# Allegro board TinyBMS-1.brd
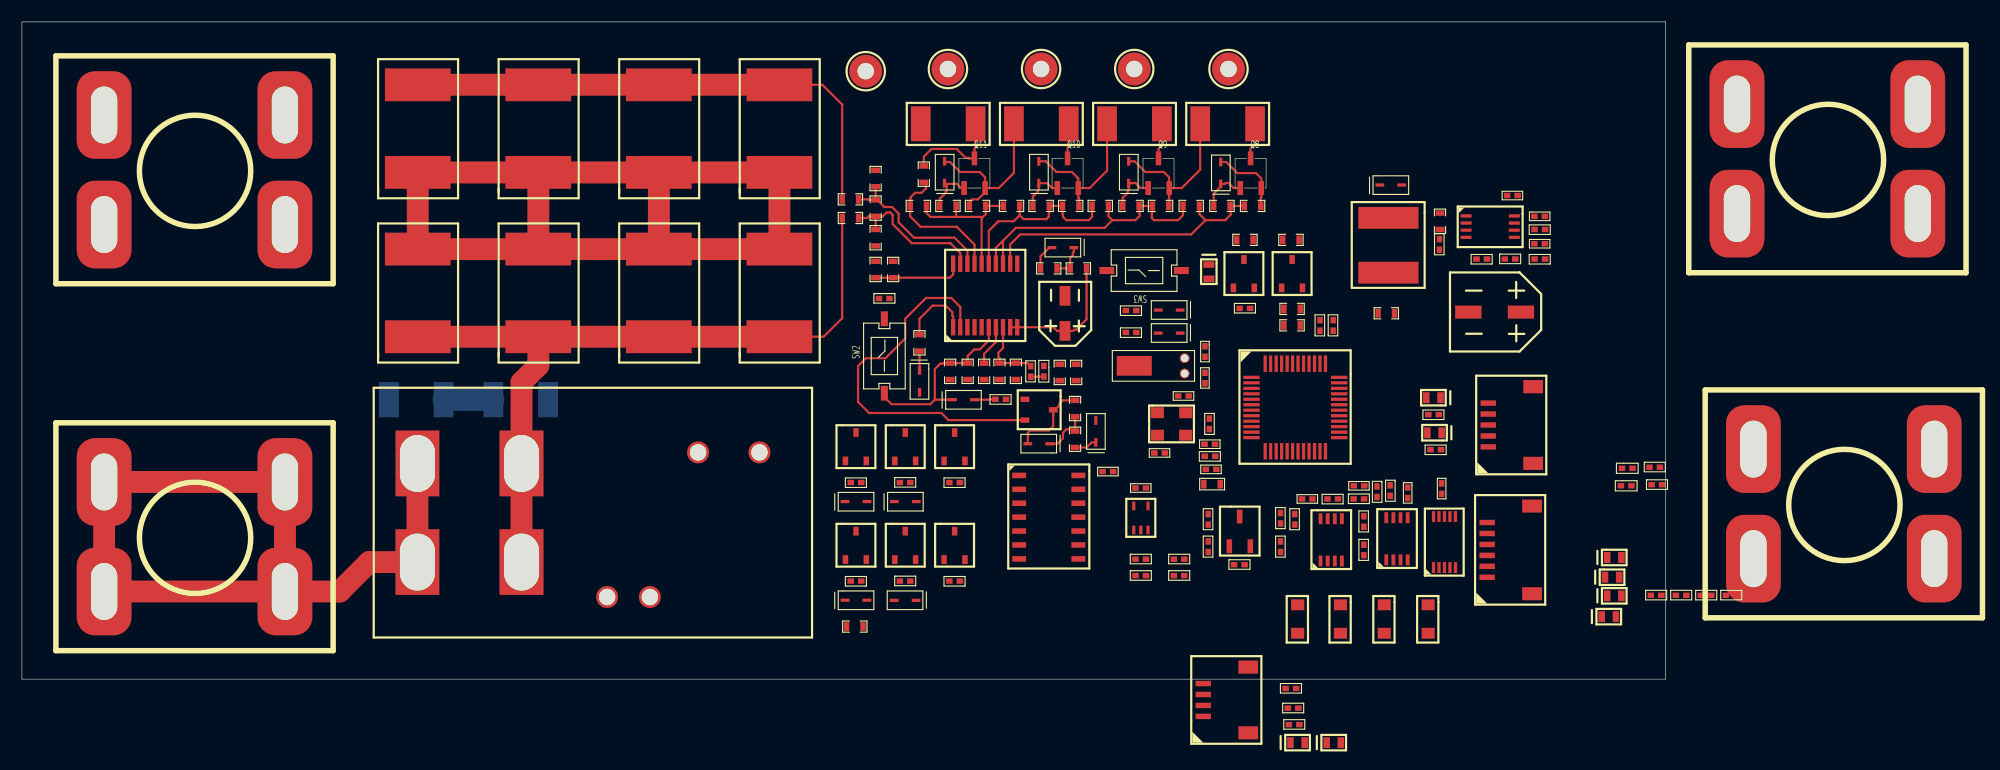
[diagram p0: board, top side]
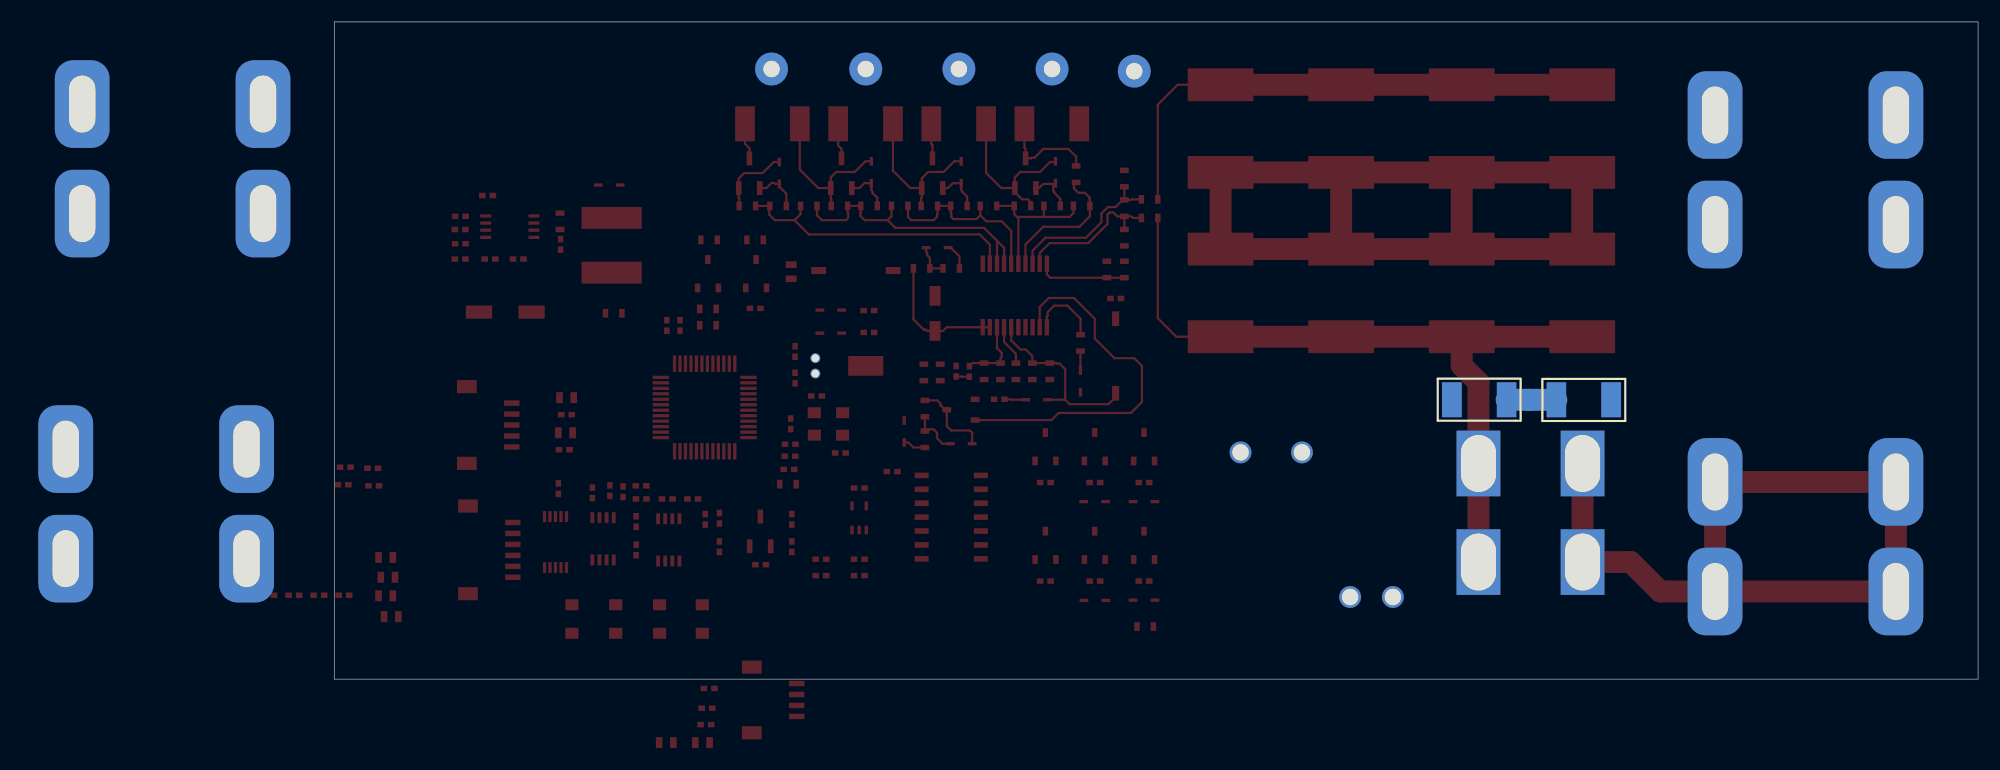
[diagram p1: board, bottom side, seen from below]

Outline 150 x 60 mm; copper layers: TOP, BOTTOM. Coordinates in mm from the lower left corner of the outline.
Outline path: 0,60 0,0 150,0 150,60 0,60

## Design rules (mm)
constraint set DEFAULT: min track width 0.127

## Placement (name value [footprint] x y rotation side)
C1  1uF  [C0603]  107.5 43.6 180 top
C6  0.1uF  [C0603]  77.5 43.8 270 top
C7  0.1uF  [C0603]  77.5 46.5 270 top
C8  0.1uF  [C0603]  77.5 41.1 270 top
C10  1uF/16V  [C0603]  87.4 28.9 270 top
C17  470pF  [C0603]  79.9 36.6 90 top
C18  10uF/6.3V  [C0603]  88.8 28.9 270 top
C19  0.1uF  [C0402]  107.9 21.2 0 top
C24  470pF  [C0603]  84.3 28.9 270 top
C25  12pF  [C0402]  105.5 25.6 0 top
C26  12pF  [C0402]  104.3 20.9 180 top
C27  12pF  [C0402]  108.2 27 90 top
C28  12pF  [C0402]  107.7 30.4 270 top
C29  0.1uF  [C0402]  109 19.4 180 top
C30  0.1uF  [C0402]  138 42 0 top
C31  0.1uF  [C0402]  136.5 44.4 180 top
C32  0.1uF  [C0603]  129 42.6 270 top
C33  0.1uF  [C0402]  138 39.5 0 top
C34  100uF/16V  [SMD-CAP-D6D3XL5D4MM]  134.4 33.5 180 top
C36  0.1uF  [C0402]  116.8 16.2 0 top
C37  0.1uF  [C0402]  126.2 17.5 270 top
C38  0.1uF  [C0402]  129.8 16.9 90 top
C39  0.1uF  [C0402]  122.5 17.9 180 top
C40  DNP  [R2512]  36 25.5 180 bottom
C41  0.1uF  [C0402]  98.6 18.7 0 top
C42  0.1uF  [C0402]  101.6 17.2 0 top
C43  1uF  [C0603]  99.2 43.6 180 top
C44  1uF  [C0603]  91.1 43.6 180 top
C45  1uF  [C0603]  82.6 43.6 180 top
C46  10uF/35V  [SMD-CAP-D4XL5D4MM]  95.2 33.4 90 top
D1  SD05-7  [SOD-323]  109.4 46.2 90 top
D7  1N4148WS  [SOD-323]  92.8 21.5 180 top
D8  1N4148WS  [SOD-323]  95 39.4 180 top
D9  LTVS16H5.0T5G  [DFN1610-2]  128.9 22.5 180 top
D11  LTVS16H5.0T5G  [DFN1610-2]  108.3 37.2 270 top
D14  LTVS16H5.0T5G  [DFN1610-2]  116.4 -5.8 0 top
D15  LTVS16H5.0T5G  [DFN1610-2]  119.7 -5.8 0 top
D16  LED  [LED0402]  93 28.6 270 top
D17  LED  [LED0402]  146 19 0 top
D18  LED  [LED0402]  145.9 17.4 0 top
D19  1N4148WS  [SOD-323]  85.9 25.5 0 top
D20  NSR0340HT1G  [SOD-323]  124.9 45.1 0 top
D22  1N4148WS  [SOD-323]  104.7 33.7 180 top
D23  1N4148WS  [SOD-323]  104.7 31.6 180 top
D24  1N4148WS  [SOD-323]  80.6 7.2 180 top
D25  1N4148WS  [SOD-323]  80.6 16.2 0 top
D26  1N4148WS  [SOD-323]  76.1 7.2 0 top
D27  1N4148WS  [SOD-323]  76.1 16.2 0 top
D28  LTVS16H5.0T5G  [DFN1610-2]  144.8 5.7 0 top
D29  LTVS16H5.0T5G  [DFN1610-2]  145.1 9.3 0 top
D30  LTVS16H5.0T5G  [DFN1610-2]  145.3 7.6 0 top
D31  LTVS16H5.0T5G  [DFN1610-2]  145.3 11.1 0 top
D32  MM3Z4V7T1G  [SOD-323]  81.9 27.2 270 top
D33  MM3Z4V7T1G  [SOD-323]  98 22.6 90 top
D34  SD05-7  [SOD-323]  101 46.26 90 top
D35  SD05-7  [SOD-323]  92.8 46.26 90 top
D36  SD05-7  [SOD-323]  84.2 46.26 90 top
D37  LTVS16H5.0T5G  [DFN1610-2]  128.8 25.7 180 top
J4  Header1x4  [SMD-HOR-SH1D0-4P]  107.8 -3.4 90 top
J6  Header1x6  [SMD-HOR-SH1D0-6P]  133.7 9.3 90 top
J7  Header1x5  [SMD-HOR-SH1D0-5P]  133.8 21.2 90 top
J8  -  [MFX04645]  7.5 51.5 0 top
J9  -  [MFX04645]  7.5 18 0 top
J10  -  [MFX04645]  156.5 52.5 0 top
J11  -  [MFX04645]  158 21 0 top
L1  4.7uH  [L0603]  107.8 17.4 0 top
L2  CD54/68uH  [SMD-IND-6X6X4D4MM]  124.7 39.7 270 top
NOREF  -  []  69.33 4.2 90 top
NOREF#2  -  []  57.35 20.71 0 top
NOREF#3  -  []  36.09 10.69 90 top
NOREF#4  -  []  61.65 20.71 0 top
NOREF#5  -  []  53.35 9.86 0 top
NOREF#6  -  []  32.5 9.86 0 top
NOREF#7  -  []  45.55 9.86 0 top
NOREF#8  -  []  36.09 19.69 0 top
NOREF#9  -  []  69.3 7.45 90 top
NOREF#10  -  []  36.05 9.86 0 top
Q8  FH3400C  [SOT-23-3]  110.7 44.4 0 top
Q9  FH3400C  [SOT-23-3]  102.3 44.4 0 top
Q10  FH3400C  [SOT-23-3]  94 44.4 0 top
Q11  FH3400C  [SOT-23-3]  85.5 44.4 0 top
Q12  FH3400C  [SOT-23]  85.1 12.2 0 top
Q13  FH3400C  [SOT-23]  76.1 12.2 0 top
Q14  FH3400C  [SOT-23]  76.1 21.2 0 top
Q15  FH3400C  [SOT-23]  85.1 21.2 0 top
Q16  FH3400C  [SOT-23]  111.5 37 0 top
Q17  FH3415C+  [SOT-23]  80.6 12.2 0 top
Q18  FH3415C+  [SOT-23]  80.6 21.2 0 top
Q19  FH3415C+  [SOT-23]  115.9 37 0 top
Q20  FH3415C+  [SOT-23]  92.8 24.6 270 top
R1  1K  [R0603]  113.1 43.6 180 top
R6  100  [R0603]  74.8 43.4 0 top
R7  100  [R0603]  74.8 41.7 0 top
R8  3mR/5W  [LVS3920-1050]  36.1 50.2 90 top
R10  1M  [R0603]  75.2 4.4 0 top
R12  2.2K  [R0603]  82.3 29.9 90 top
R14  1M  [R0603]  77.5 38.2 270 top
R16  100  [R0603]  95.6 37.1 0 top
R17  10K  [R0603]  96.6 27.2 90 top
R19  1K  [R0603]  92.9 37.1 0 top
R20  10K  [R0603]  95.1 27.2 90 top
R24  1M  [R0603]  96.5 23.9 90 top
R25  10K  [R0402]  108.9 20.6 180 top
R29  DNP  [R0603]  91.1 27.3 90 top
R31  10K  [R0402]  89.8 25.8 180 top
R37  0  [R0402]  118.7 31.8 90 top
R38  DNP  [R0402]  119.9 31.8 90 top
R39  10K  [R0402]  115.5 -2.9 0 top
R40  10K  [R0402]  115.3 -1.1 0 top
R41  1K  [R0402]  115.6 -4.4 0 top
R43  1K  [R0402]  129.3 24.4 180 top
R44  2K  [R0402]  92.3 27.6 90 top
R45  2K  [R0402]  148.5 19.1 0 top
R46  2K  [R0402]  148.7 17.5 0 top
R47  1M  [R0402]  108.1 23.8 270 top
R48  100K  [R0402]  129.6 39.2 90 top
R50  2K  [R0402]  133.7 38.6 180 top
R51  1K  [R0402]  135.3 38.1 0 top
R52  10K  [R0402]  139 38.6 180 top
R53  0  [R0603]  123.7 33 0 top
R55  100K  [R0603]  115.1 33.4 0 top
R57  100  [R0402]  101.7 31.9 180 top
R59  100K  [R0402]  76.6 9.2 180 top
R60  100K  [R0402]  76.6 18.2 180 top
R61  47K  [R0402]  80.1 8.7 0 top
R62  47K  [R0402]  80.1 17.7 0 top
R63  100K  [R0402]  85.6 9.2 180 top
R64  100K  [R0402]  85.6 18.2 180 top
R65  1K  [R0402]  101.6 10.7 0 top
R66  1K  [R0402]  105.1 10.7 0 top
R67  1K  [R0402]  148.63 7.41 0 top
R68  1K  [R0402]  150.91 7.41 0 top
R69  1K  [R0402]  153.19 7.41 0 top
R70  1K  [R0402]  155.48 7.41 0 top
R71  365  [R0402]  110.6 10.2 0 top
R72  DNP  [R0402]  108.5 11.6 90 top
R73  0  [R0402]  108.5 14.1 90 top
R74  2.15K  [R0402]  116.4 14.1 90 top
R75  PT100  [R1210]  116.4 5.5 270 top
R76  2.15K  [R0402]  115.1 14.2 90 top
R77  100  [R0402]  115.1 11.6 90 top
R78  10K  [R0402]  122.7 11.3 90 top
R79  237K  [R0402]  120.1 16.7 180 top
R80  10K  [R0402]  122.7 13.9 90 top
R81  237K  [R0402]  121.5 16.2 0 top
R82  PT100  [R1210]  120.3 5.5 270 top
R83  PT100  [R1210]  124.3 5.5 270 top
R84  PT100  [R1210]  128.3 5.5 270 top
R85  15.1K  [R0402]  124.6 17.7 270 top
R86  15.1K  [R0402]  123.4 17.6 270 top
R87  DNP  [R2512]  45.5 25.5 0 bottom
R88  2.2K  [R0603]  96.5 21.1 90 top
R89  DNP  [R0402]  101.6 9.2 0 top
R90  DNP  [R0402]  105.1 9.2 0 top
R91  39  [R2512]  110 50.7 0 top
R92  10K  [R0603]  108.7 42.8 0 top
R93  39  [R2512]  101.5 50.7 0 top
R94  10K  [R0603]  100.4 42.8 0 top
R95  1K  [R0603]  104.7 43.6 180 top
R96  10K  [R0603]  92.2 42.8 0 top
R97  1K  [R0603]  96.5 43.6 180 top
R98  39  [R2512]  93 50.7 0 top
R99  10K  [R0603]  83.7 42.8 0 top
R100  1K  [R0603]  86.4 42.8 0 top
R101  39  [R2512]  84.5 50.7 0 top
R102  1K  [R0603]  81.9 46.9 270 top
R103  10K  [R0402]  78.2 34.5 0 top
R105  10K  [R0402]  129.5 21.2 180 top
R107  100K  [R0402]  139 41.3 180 top
R108  DNP  [R0402]  101.7 33.9 180 top
R109  100K  [R0402]  111.1 33.6 0 top
R110  100  [R0603]  115.1 31.9 0 top
R111  3mR/5W  [LVS3920-1050]  47.1 50.2 90 top
R112  3mR/5W  [LVS3920-1050]  58.1 50.2 90 top
R113  0  [R0603]  112.4 40.5 180 top
R114  DNP  [R0603]  115 39.7 0 top
R115  3mR/5W  [LVS3920-1050]  69.1 50.2 90 top
R116  3mR/5W  [LVS3920-1050]  36.1 35.2 90 top
R117  3mR/5W  [LVS3920-1050]  47.1 35.2 90 top
R118  3mR/5W  [LVS3920-1050]  58.1 35.2 90 top
R119  3mR/5W  [LVS3920-1050]  69.1 35.2 90 top
RL1  -  [HF197F-110]  52.1 15.2 0 top
RV1  10K  [R0603]  85.9 28.9 270 top
SW2  BUTTON  [SW-SMD-3D0X6D0-2P]  78.7 29.5 90 top
SW3  BUTTON  [SW-SMD-3D0X6D0-2P]  102.4 37.3 180 top
TP1  BAT-  [TP_THR_CIR_3D0_1D5]  77 55.5 0 top
TP2  SOLDERING  [TP_THR_CIR_3D0_1D5]  84.5 55.7 0 top
TP3  SOLDERING  [TP_THR_CIR_3D0_1D5]  93 55.7 0 top
TP4  SOLDERING  [TP_THR_CIR_3D0_1D5]  101.5 55.7 0 top
TP5  BAT+  [TP_THR_CIR_3D0_1D5]  110.1 55.7 0 top
U1  BQ7692003PWR  [TSSOP-20]  87.9 35 90 top
U2  STM32F103CBT6  [LQFP-48]  116.2 24.8 270 top
U4  LM5007MM  [VSSOP-8]  134 41.3 270 top
U5  TL431  [SOT-23-3-TL431]  109.7 11.7 0 top
U6  XLV358-MS  [MSOP-8]  118.5 14.4 0 top
U7  XLV358-MS  [MSOP-8]  124.5 14.5 0 top
U8  RS2255XN  [MSOP-10]  129.8 12.5 0 top
U9  SN74F00DR  [SOIC-14]  90.6 19.2 270 top
U10  SN74AUP1G00DCKR  [SC-70-5]  102.1 14.7 0 top
Y3  8MHz  [SMD3225-4P]  104.9 23.3 0 top
Y4  32.768KHz  [DT-26]  106.1 29.3 270 top

## Library data of the parts
C1 C6-C8 C10 C17-C19 C24-C34 C36-C45 = CAP NP
C46 = CAP POL
D1 D34-D36 = DIODE SCHOTTKY
D7 D8 D19 D20 D22-D27 = DIODE
D9 D11 D14 D15 D28-D31 D37 = DIODE TVS
D16-D18 = LED
D32 D33 = DIODE ZENER
J4 = Header1x4
J6 = Header1x6
J7 = Header1x5
J8-J11 = MFX04645
L1 L2 = INDUCTOR
Q8-Q11 Q17-Q20 = BSS84
Q12-Q16 = FH3400C
R1 R6-R8 R10 R12 R14 R16 R17 R19 R20 R24 R25 R29 R31 R37-R41 R43-R48 R50-R53 R55 R57 R59-R103 R105 R107-R119 = R
RL1 = Relay
RV1 = VARISTOR
SW2 SW3 = SW PUSHBUTTON
TP1-TP5 = T POINT F
U1 = BQ7692003PWR
U2 = STM32F103CBT6
U4 = LM5007MM
U5 = TL431/TI
U6 U7 = XLV358-MS
U8 = RS2255XN
U9 = SN74F00DR
U10 = SN74AUP1G00DCKR
Y3 = CRYSTAL
Y4 = CRYSTAL-2P

## Footprints (pads in the part's own frame, mm; a bottom-side part is the same pattern mirrored in y, then rotated)
C0402
  rect 0.6x0.5 smd: 1(0.01,0.25) 2(0.97,0.25)
C0603
  rect 0.5x0.8 smd: 1(0.05,0.4) 2(1.55,0.4)
DFN1610-2
  rect 0.6x1 smd: 1(-0.647,0.006) 2(0.653,0.006)
DT-26
  round 0.9 hole 0.7: 1(0,0) 2(1.4,0)
  rect 1.8x3.2 smd: 3(0.7,-4.6)
HF197F-110
  round 2 hole 1.5: 1(9.6,5.5) 2(15.2,5.5) 7(1.3,-7.7) 8(5.2,-7.7)
  rect 4x6 hole 3.2x5.2: 3(-6.51,4.488) 4(-6.51,-4.512) 5(-16.01,4.488) 6(-16.01,-4.512)
L0603
  rect 0.5x0.8 smd: 1(0.05,0.4) 2(1.55,0.4)
LED0402
  rect 0.6x0.5 smd: 1(0.01,0.25) 2(0.97,0.25)
LQFP-48
  rect 0.3x1.5 smd: 1(-2.75,-4) 2(-2.25,-4) 3(-1.75,-4) 4(-1.25,-4) 5(-0.75,-4) 6(-0.25,-4) 7(0.25,-4) 8(0.75,-4) 9(1.25,-4) 10(1.75,-4) 11(2.25,-4) 12(2.75,-4) 25(2.75,4) 26(2.25,4) 27(1.75,4) 28(1.25,4) 29(0.75,4) 30(0.25,4) 31(-0.25,4) 32(-0.75,4) 33(-1.25,4) 34(-1.75,4) 35(-2.25,4) 36(-2.75,4)
  rect 1.5x0.3 smd: 13(4,-2.75) 14(4,-2.25) 15(4,-1.75) 16(4,-1.25) 17(4,-0.75) 18(4,-0.25) 19(4,0.25) 20(4,0.75) 21(4,1.25) 22(4,1.75) 23(4,2.25) 24(4,2.75) 37(-4,2.75) 38(-4,2.25) 39(-4,1.75) 40(-4,1.25) 41(-4,0.75) 42(-4,0.25) 43(-4,-0.25) 44(-4,-0.75) 45(-4,-1.25) 46(-4,-1.75) 47(-4,-2.25) 48(-4,-2.75)
LVS3920-1050
  rect 3x6 smd: 1(-3.94,-0.02) 2(4.06,-0.02)
MFX04645
  rrect 5x8 hole 2.4x5.2: 1(0,0) 2(16.5,0) 3(0,-10) 4(16.5,-10)
MSOP-8
  rect 0.35x1 smd: 1(-0.001,-3.615) 2(0.649,-3.615) 3(1.299,-3.615) 4(1.949,-3.615) 5(1.949,0.241) 6(1.299,0.241) 7(0.649,0.241) 8(-0.001,0.241)
MSOP-10
  rect 0.3x1 smd: 1(-0.99,-2.31) 2(-0.49,-2.31) 3(0.01,-2.31) 4(0.51,-2.31) 5(1.01,-2.31) 6(1.01,2.34) 7(0.51,2.34) 8(0.01,2.34) 9(-0.49,2.34) 10(-0.99,2.34)
R0402
  rect 0.6x0.5 smd: 1(0.01,0.25) 2(0.97,0.25)
R0603
  rect 0.5x0.8 smd: 1(0.05,0.4) 2(1.55,0.4)
R1210
  rect 1x1.2 smd: 1(-1.289,0.015) 2(1.311,0.015)
R2512
  rect 1.8x3.2 smd: 1(-2.48,-0.002) 2(2.52,-0.002)
SC-70-5
  rect 0.3x0.8 smd: 1(-0.646,-1.085) 2(0.004,-1.085) 3(0.654,-1.085) 4(0.654,1.115) 5(-0.646,1.115)
SMD3225-4P
  rect 1.2x1 smd: 1(-1.285,-1.028) 2(1.29,-1.026) 3(1.297,1.021) 4(-1.29,1.023)
SMD-CAP-D4XL5D4MM
  rect 1.8x1 smd: 1(-1.61,0.02) 2(1.59,0.02)
SMD-CAP-D6D3XL5D4MM
  rect 2.4x1.2 smd: 1(-2.39,-0.01) 2(2.41,-0.01)
SMD-HOR-SH1D0-4P
  rect 0.5x1.4 smd: 1(0,0) 2(1,0) 3(2,0) 4(3,0)
  rect 1.2x1.8 smd: 5(4.5,-4.1) 6(-1.5,-4.1)
SMD-HOR-SH1D0-5P
  rect 0.5x1.4 smd: 1(0,0) 2(1,0) 3(2,0) 4(3,0) 5(4,0)
  rect 1.2x1.8 smd: 6(5.5,-4.1) 7(-1.5,-4.1)
SMD-HOR-SH1D0-6P
  rect 0.5x1.4 smd: 1(0,0) 2(1,0) 3(2,0) 4(3,0) 5(4,0) 6(5,0)
  rect 1.2x1.8 smd: 7(6.5,-4.1) 8(-1.5,-4.1)
SMD-IND-6X6X4D4MM
  rect 2x5.5 smd: 1(-2.41,-0.01) 2(2.59,-0.01)
SOD-323
  rect 0.8x0.3 smd: 1(-0.99,0.01) 2(1.01,0.01)
SOIC-14
  rect 0.51x1.27 smd: 1(0.6,0.4) 2(1.87,0.4) 3(3.14,0.4) 4(4.41,0.4) 5(5.68,0.4) 6(6.95,0.4) 7(8.22,0.4) 8(8.22,5.8) 9(6.95,5.8) 10(5.68,5.8) 11(4.41,5.8) 12(3.14,5.8) 13(1.87,5.8) 14(0.6,5.8)
SOT-23
  rect 0.5x0.8 smd: 1(-0.95,-1.28) 2(0.95,-1.28) 3(0.01,1.31)
SOT-23-3
  rect 0.51x1.27 smd: 1(0.476,0.434) 2(2.391,0.434) 3(1.415,3.142)
SOT-23-3-TL431
  rect 0.51x1.27 smd: 1(0.476,0.434) 2(1.415,3.142) 3(2.391,0.434)
SW-SMD-3D0X6D0-2P
  rect 1.35x0.65 smd: 1(-3.4,0) 2(3.4,0)
TP_THR_CIR_3D0_1D5
  round 3 hole 1.5: 1(0,0)
TSSOP-20
  rect 1.5x0.4 smd: 1(-2.872,2.924) 2(-2.872,2.274) 3(-2.872,1.624) 4(-2.872,0.974) 5(-2.872,0.324) 6(-2.872,-0.326) 7(-2.872,-0.976) 8(-2.872,-1.626) 9(-2.872,-2.276) 10(-2.872,-2.926) 11(2.928,-2.926) 12(2.928,-2.276) 13(2.928,-1.626) 14(2.928,-0.976) 15(2.928,-0.326) 16(2.928,0.324) 17(2.928,0.974) 18(2.928,1.624) 19(2.928,2.274) 20(2.928,2.924)
VSSOP-8
  rect 0.3x1 smd: 1(-0.985,-2.22) 2(-0.335,-2.22) 3(0.315,-2.22) 4(0.965,-2.22) 5(0.965,2.18) 6(0.315,2.18) 7(-0.335,2.18) 8(-0.985,2.18)

## Nets
GND: C7.1 C8.2 C10.2 C17.2 C18.2 C19.1 C24.2 C25.1 C26.1 C27.1 C28.1 C29.2 C30.2 C31.2 C33.2 C34.1 C36.1 C37.1 C38.2 C39.2 C41.2 C42.2 C46.2 D9.2 D11.2 D14.2 D15.2 D16.1(CATHODE) D20.2 D26.2 D27.2 D28.2 D29.2 D30.2 D31.2 D32.2 D33.2 D37.2 J4.4 J4.5 J4.6 J6.5 J6.7 J6.8 J7.3 J7.4 J7.6 J7.7 J8.1 J8.2 J8.3 J8.4 Q12.2(S) Q13.2(S) Q14.2(S) Q15.2(S) Q16.2(S) Q20.1 R6.1 R8.2 R14.1 R37.2 R48.1 R52.1 R59.1 R60.1 R63.1 R64.1 R72.1 R75.2 R77.1 R82.2 R83.2 R84.2 R86.1 R101.1 R107.1 R109.1 R111.2 R112.2 R115.2 RV1.2 SW3.2 TP1.1(TP) U1.3(VSS) U2.8 U2.23 U2.35 U2.47(VSS_3) U4.4 U5.2 U6.4 U7.4 U8.4 U8.5 U9.7 U10.3 Y3.2 Y3.4 Y4.3
VDD25: R74.2 R76.2 R85.2 U6.1 U6.2
VDD33: C36.2 C37.2 C38.1 C41.1 C42.1 J4.1 L1.1 R17.2 R20.2 R25.2 R29.1 R38.2 R39.2 R40.2 R45.1 R46.1 R53.1 R71.2 R105.2 U2.1 U2.24 U2.36 U2.48 U6.8 U7.8 U8.10 U9.14(VCC) U10.5
VDD168: D24.1(K) D25.1(K) Q17.2(S) Q18.2(S) R61.2 R62.2
ADC1_IN8: R79.2 U2.18 U6.7(OUTB)
BMS_ALERT: C17.1 R14.2 U1.20 U2.38
BMS_ON: R31.1 U2.40
CHG: D33.1(CATHODE) R88.1 R89.2
CTL1: R65.2 U2.21
CTL2: R66.2 U2.22
DSG: D32.1(CATHODE) R12.1 R90.2
EXT_EN: J7.5 R110.2
HCTL1: Q12.1 Q14.1 R60.2 R63.2 U9.6
HCTL2: Q13.1 Q15.1 R59.2 R64.2 U9.11
I2C1_SCL: R17.1 U1.5 U2.45
I2C1_SDA: R20.1 U1.4 U2.46
LED0: D17.1(CATHODE) U2.32
LED1: D18.1(CATHODE) U2.33
MCU_EN: R57.2
MCU_HOLD: U2.39
REGOUT: C18.1 R29.2 R44.2 R108.2 U1.8
SELA: U2.19 U8.7
SELB: U2.20 U8.6
SPI1_MISO: R70.2 U2.16
SPI1_MOSI: R69.2 U2.17
SPI1_NSS: R67.2 U2.14
SPI1_SCK: R68.2 U2.15
SWCLK: D14.1(CATHODE) J4.2 R39.1 U2.37
SWDIO: R41.2 U2.34
TIM1_CH1: U2.29
TIM1_CH1N: U2.26
TIM1_CH2: U2.30
TIM1_CH2N: U2.27
TIM1_CH3: U2.31
TIM1_CH3N: U2.28
USART1_RX: D9.1(CATHODE) J7.1 R105.1 U2.43
USART1_TX: R43.2 U2.42
USART2_RX: U2.13
USART2_TX: U2.12
VC1: C44.2 C45.1 R99.2 R100.2 R103.1 R113.2 U1.16
WAKE_UP: C24.1 D19.1(K) RV1.1 SW2.1 U1.6
N00153: C1.2 C43.1 R94.2 R95.2 U1.13 U1.14
N01121: D34.2(CATHODE) Q9.2(S) R91.1 R95.1 TP4.1(TP)
N02162: C6.1 C7.2 R6.2 U1.18
N02176: C6.2 C8.1 R7.2 U1.19
N02237: R7.1 R87.2 R116.1 R117.1 R118.1 R119.1 RL1.3 RL1.4
N02763: D7.1(K) R10.2 R24.1 R88.2
N03241: Q20.2(S) U1.2
N04366: R12.2 U1.1
N05476: C46.1 R16.2 U1.9 U1.10
N06905: C31.1 D1.2(CATHODE) D8.2 J10.1 J10.2 J10.3 J10.4 J11.1 J11.2 J11.3 J11.4 Q8.2(S) R1.1 R19.1 R114.2 TP5.1(TP) U4.8(VIN)
N06945: D8.1(K) R16.1 R19.2
N07349: C10.1 U1.7
N32319: D15.1(CATHODE) J4.3 R40.1 R41.1
N45632: D19.2 R31.2
N60275: C32.2 U4.2
N60407: C32.1 D20.1(K) L2.1 U4.1
N60487: C34.2 L2.2 R50.2 R53.2
N60523: C30.1 U4.7
N60535: R48.2 U4.3
N60543: C33.1 R51.2 R52.2 U4.5
N60675: R50.1 R51.1
N62346: R37.1 R38.1 U2.44
N62530: C26.2 R47.2 U2.6 Y3.1
N62534: C25.2 R47.1 U2.5 Y3.3
N62538: C27.2 U2.4 Y4.2
N62542: C28.2 U2.3 Y4.1
N62840: C19.2 R25.1 U2.7
N62876: C29.1 L1.2 U2.9
N66854: D24.2 D26.1(K) Q13.3 Q17.3 RL1.1
N66902: Q12.3 Q17.1 R61.1
N72236: D25.2 D27.1(K) Q14.3 Q18.3 RL1.2
N76887: Q15.3 Q18.1 R62.1
N86420: D28.1(CATHODE) J6.1 R67.1
N86427: D29.1(CATHODE) J6.2(WR) R68.1
N86434: D30.1(CATHODE) J6.3 R69.1
N86441: D31.1(CATHODE) J6.4 R70.1
N86910: D17.2 R45.2
N86956: D18.2 R46.2
N90859: R71.1 R73.2 U5.3
N95637: R72.2 R73.1 U5.1(REF) U6.3
N97042: R76.1 R77.2 U7.3
N97046: R74.1 U7.5 U8.9
N98736: R78.2 R79.1 U6.6
N98835: R80.2 R81.1 U6.5
N100399: R80.1 U7.6 U7.7(OUTB)
N101244: R78.1 U7.1 U7.2
N105903: R75.1 U8.8
N105907: R82.1 U8.3
N105911: R83.1 U8.1
N105915: R84.1 U8.2(X3)
N115788: C39.1 R81.2 R85.1 R86.2
N129705: D7.2 Q20.3 R24.2
N129935: C40.2 J9.1 J9.2 J9.3 J9.4 R10.1 RL1.5 RL1.6
N130360: C40.1 R87.1
N133152: U9.3 U9.4 U9.5
N133196: U9.8 U9.12 U9.13
N137595: U9.2 U9.10 U10.4(Y)
N137612: R65.1 R89.1 U9.1 U10.1
N137616: R66.1 R90.1 U9.9 U10.2
N140319: Q8.3 R91.2
N140441: C1.1 R1.2 R92.2 U1.12
N140869: D1.1 Q8.1 R92.1
N142766: Q9.3 R93.2
N142773: D35.2(CATHODE) Q10.2(S) R93.1 R97.1 TP3.1(TP)
N142879: D34.1 Q9.1 R94.1
N143225: D35.1 Q10.1 R96.1
N143454: C43.2 C44.1 R96.2 R97.2 U1.15
N144047: Q10.3 R98.2
N144054: D36.2(CATHODE) Q11.2(S) R98.1 R100.1 TP2.1(TP)
N144202: D36.1 Q11.1 R99.1
N144572: Q11.3 R101.2 R102.1
N144615: C45.2 R102.2 U1.17
N146314: R103.2 SW2.2
N155464: D11.1(CATHODE) Q16.3 Q19.1 R55.1 R110.1 SW3.1
N155472: Q19.3 R107.2 U4.6
N155484: Q19.2(S) R55.2 R113.1 R114.1
N160866: D22.1(K) D23.1(K) Q16.1 R109.2
N160870: D23.2 R57.1
N160997: D22.2 R108.1
N162969: D16.2 R44.1
N169622: D37.1(CATHODE) J7.2 R43.1
N232879: R8.1 R111.1 R112.1 R115.1 R116.2 R117.2 R118.2 R119.2

Pads without a net: J6 6; RL1 7 8; U1 11; U2 2 10 11 25 41

## Routing (per net, layer and track width the routed paths; a pad name or vN(x,y) marks a point on that pad's centre or on a via; arc(x,y) is an arc through that point)
GND: length 48.1
  TOP w0.2: R6.1 74.85,52.45 73.04,54.26 R115.2
  TOP w2: R8.2 R111.2 R112.2 R115.2
BMS_ALERT: length 8.2
  TOP w0.2: R14.2 C17.1 84.67,36.65 84.98,36.95 U1.20
CHG: length 2.1
  TOP w0.2: D33.1 97.61,21.61 97.15,21.15 R88.1
DSG: length 1.8
  TOP w0.2: R12.1 81.9,29.47 81.91,29.46 D32.1
REGOUT: length 6.5
  TOP w0.2: U1.8 89.53,30.23 89.1,29.8 89.1,29.43 89.2,29.33 C18.1 R29.2 91.77,28.85 R44.2
VC1: length 14
  TOP w0.2: 87.6,42.1 87.6,42.2 85.25,42.2 ; 87.6,42.1 87.95,42.45 R100.2 C44.2 ; 87.6,42.1 87.58,42.08 U1.16 ; R99.2 85.25,42.2 ; 85.25,42.2 82.9,42.2 82.55,42.55 C45.1
WAKE_UP: length 17.4
  TOP w0.2: U1.6 88.23,30.93 87.4,30.1 86.9,30.1 86.3,29.5 RV1.1 C24.1 84.07,28.85 84.02,28.8 83.8,28.8 83.3,28.3 83.3,25.51 ; 83.3,25.51 D19.1 ; 83.3,25.51 82.89,25.1 79.35,25.1 78.7,25.75 SW2.1
N00153: length 26.5
  TOP w0.2: 89.53,40.03 90.7,41.2 98.8,41.2 99.5,41.9 ; 89.53,40.03 88.88,39.38 U1.14 ; 89.53,40.03 U1.13 ; C1.2 105.95,42.35 105.5,41.9 103.3,41.9 103.1,42.1 103.1,42.52 103.15,42.57 R95.2 R94.2 101.95,42.57 102,42.52 102,42.3 101.6,41.9 99.5,41.9 ; 99.5,41.9 99.15,42.25 C43.1
N01121: length 14.6
  TOP w0.2: R91.1 107.52,46.52 105.83,44.83 Q9.2 ; Q9.2 104.69,45.81 104.2,46.3 102.5,46.3 101.53,47.27 D34.2 ; Q9.2 104.69,43.87 104.65,43.83 R95.1
N02162: length 14.7
  TOP w0.2: C6.1 78.05,43.75 78.7,43.1 79.4,43.1 80,42.5 80,41.7 81.4,40.3 85.1,40.3 86.28,39.12 U1.18 ; C6.1 C7.2 ; C6.1 77.27,43.75 77.22,43.8 R6.2
N02176: length 13.7
  TOP w0.2: C6.2 C8.1 ; C6.2 77.27,42.25 77.12,42.1 R7.2 ; C6.2 78.55,42.25 78.9,42.6 79.25,42.6 79.45,42.4 79.45,41.55 81.2,39.8 84.73,39.8 85.63,38.91 U1.19
N02237: length 69.8
  TOP w0.2: R119.1 73.16,31.26 74.85,32.95 R7.1
  TOP w2: R119.1 R118.1 R117.1 ; R116.1 R117.1 ; R117.1 47.12,28.63 45.59,27.1 RL1.3 RL1.4
N02763: length 4.5
  TOP w0.2: D7.1 94.49,21.49 95,22 95,22.5 95.3,22.8 95.95,22.8 R88.2 R24.1
N03241: length 34.3
  TOP w0.2: Q20.2 84.55,23.65 83.9,24.3 77.3,24.3 76.3,25.3 76.3,28.6 77,29.3 78.8,29.3 80.6,31.1 80.6,32.9 82.5,34.8 84.8,34.8 85.63,33.97 U1.2
N04366: length 6.6
  TOP w0.2: R12.2 81.9,32.9 83.1,34.1 84.3,34.1 84.9,33.5 84.9,33.18 84.98,33.11 U1.1
N05476: length 12.2
  TOP w0.2: U1.9 U1.10 94.11,32.13 94.45,31.79 C46.1 95.91,31.79 96.02,31.9 96.2,31.9 97.15,32.85 R16.2
N06905: length 9.3
  TOP w0.2: D1.2 109.89,47.21 110.9,46.2 112.6,46.2 113.09,45.71 Q8.2 113.09,43.97 113.05,43.93 R1.1 ; D8.2 93.74,39.39 92.95,38.6 R19.1
N06945: length 3.2
  TOP w0.2: R19.2 R16.1 95.65,38.45 95.9,38.7 95.9,38.92 95.99,39.01 D8.1
N07349: length 3.7
  TOP w0.2: C10.1 87.8,29.7 88.88,30.78 U1.7
N45632: length 1.9
  TOP w0.2: R31.2 88.3,25.55 88.26,25.51 D19.2
N129705: length 7.5
  TOP w0.2: R24.2 94.97,25.45 94.67,25.15 94.67,25 94.26,24.59 Q20.3 94.11,24.11 94.1,24.1 94.1,23.1 93.7,22.7 92,22.7 91.79,22.49 D7.2
N129935: length 75.2
  TOP w2: RL1.5 RL1.6 31.69,10.69 29,8 J9.4 ; J9.4 J9.3 J9.1 J9.2 J9.4
N130360: length 4.5
  BOTTOM w2: C40.1 40.99,25.5 40.99,25.5 R87.1
N140319: length 3.3
  TOP w0.2: R91.2 112.52,48.87 112.11,48.47 Q8.3
N140441: length 26.6
  TOP w0.2: C1.1 107.45,42.45 108,41.9 ; 108,41.9 106.7,40.6 91.1,40.6 90.18,39.68 U1.12 ; 108,41.9 109.8,41.9 110.3,42.4 110.3,43.15 R92.2 R1.2
N140869: length 4.3
  TOP w0.2: Q8.1 110.57,44.83 110.1,45.3 109.86,45.3 109.77,45.21 D1.1 109.39,44.96 108.75,44.32 R92.1
N142766: length 3.3
  TOP w0.2: Q9.3 103.72,48.4 104.02,48.71 R93.2
N142773: length 14.3
  TOP w0.2: D35.2 93.43,47.27 94.4,46.3 95.8,46.3 96.3,45.8 96.3,45.79 96.39,45.7 Q10.2 ; Q10.2 97.43,44.83 99.02,46.42 R93.1 ; Q10.2 96.39,43.97 96.45,43.91 R97.1
N142879: length 4.3
  TOP w0.2: R94.1 100.45,43.95 100.9,44.4 100.9,44.56 100.99,44.65 D34.1 101.37,45.27 101.39,45.3 101.6,45.3 102.07,44.83 Q9.1
N143225: length 4.2
  TOP w0.2: Q10.1 93.99,44.83 93.55,45.27 D35.1 92.79,44.65 92.7,44.56 92.7,44.5 92.25,44.05 R96.1
N143454: length 17.3
  TOP w0.2: 91.05,42.35 91.4,42 93.5,42 93.7,42.2 93.7,42.52 93.75,42.57 R96.2 R97.2 94.95,42.45 95,42.4 95,42.2 95.3,41.9 97.35,41.9 97.65,42.2 C43.2 ; 91.05,42.35 90.5,41.8 89.1,41.8 88.23,40.93 U1.15 ; 91.05,42.35 C44.1
N144047: length 3.2
  TOP w0.2: Q10.3 95.42,48.77 95.52,48.87 R98.2
N144054: length 15.5
  TOP w0.2: 84.19,47.21 84.69,47.21 85.6,46.3 87.4,46.3 87.9,45.8 87.9,44.84 Q11.2 ; Q11.2 89.13,44.83 90.52,46.22 R98.1 ; Q11.2 87.89,44.45 87.24,43.8 86.7,43.8 86.45,43.55 R100.1
N144202: length 4.2
  TOP w0.2: R99.1 83.75,43.85 84.3,44.4 84.3,44.49 84.39,44.58 84.39,45.21 85.32,45.21 85.69,44.83 Q11.1 86.18,44.83
N144572: length 9.3
  TOP w0.2: R102.1 82.3,47.7 83,48.4 85.3,48.4 86.1,47.6 86.37,47.6 86.43,47.54 Q11.3 86.92,48.4 87.02,48.51 R101.2
N144615: length 12.7
  TOP w0.2: U1.17 86.93,39.67 85.3,41.3 82,41.3 81.05,42.25 C45.2 81.05,43.83 81.1,43.88 81.1,44 81.5,44.4 82.1,44.4 82.5,44.8 82.5,45.35
N162969: length 1.2
  TOP w0.2: R44.1 92.75,27.61 92.77,27.63 D16.2
N232879: length 94
  TOP w2: R117.2 R116.2 R8.1 R111.1 ; R117.2 R111.1 ; R117.2 R118.2 ; R112.1 R115.1 R119.2 R118.2 ; R112.1 R111.1 ; R112.1 R118.2
